# Altium PCB PowerPlane.PcbDoc (part 2 of 2)
Units mm, origin at the board's own origin, x right, y up, seen from the top; angles counter-clockwise.
Board outline 140 x 96 mm, 2 copper layers (Top Layer, Bottom Layer); 117 components, 76 nets, 342 pads, 71 vias.
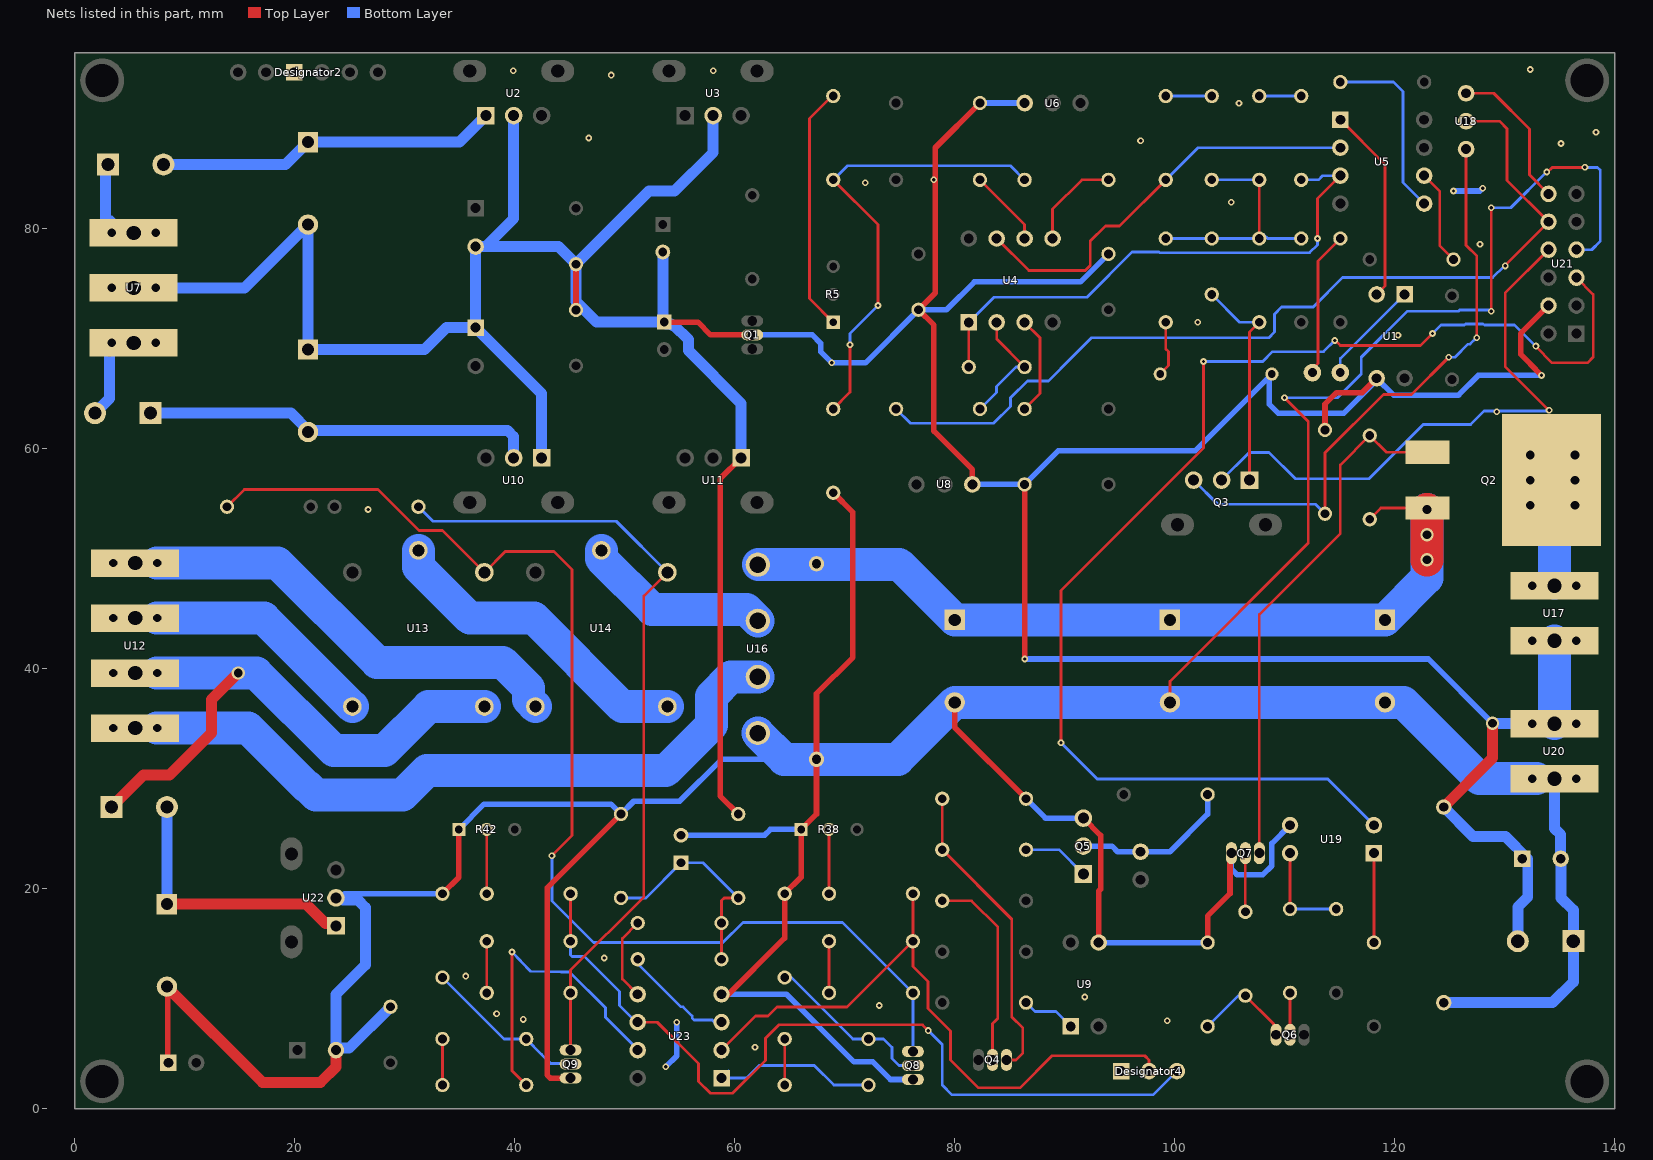
[diagram p2: the nets of this part, all layers, seen from the top]

## Via types
v1: diameter 0.61, hole 0.305, Top Layer to Bottom Layer, 60 vias
v2: diameter 1.2, hole 0.8, Top Layer to Bottom Layer, 11 vias

## Nets (pads, with @x,y where several pads share a name; then routed paths per layer and width w, separated by ;. In a path a pad name is that pad's centre, name@x,y a point inside that pad or via, vN(x,y) a via of type N, cw(c..) or ccw(c..) an arc to the next point about the centre after c; other vN are vias at no path point) (continued)
GND: C14.2 C15.2 C16.2 C17.2 C18.2 C19.2 C20.2 C21.1 D11.1 Designator3.1 Designator4.1 Q5.3 Q7.3 Q8.3 Q9.3 R18.2 R28.2 R30.2 R32.1 R33.1 R34.1 R38.2 R42.2 R45.2 R46.2 U9.3 U16.1 U19.3 U20.2 U21.4 U22.2 U23.4 | length 471
  Top Layer w0.254: C15.2@99.568,36.957 99.568,38.862 112.141,51.435 112.141,62.484 v1(109.982,64.643) ; v1(128.778,72.517) v1(128.778,81.915) ; v1(133.814,85.173) 133.911,85.173 134.326,85.589 137.278,85.589 v1(137.296,85.607)
  Top Layer w0.508: C20.2@8.382,11.109 8.445,11.045 8.445,4.381 Designator3.1@8.509,4.318 ; R45.2@33.428,19.558 34.925,21.055 R42.2@34.925,25.4 ; Q9.3@45.12,2.777 43.24,2.777 42.943,3.075 42.943,20.083 R34.1@49.657,26.797 ; U23.4@59.118,10.096 64.543,15.521 R46.2@64.543,19.558 66.04,21.055 R38.2@66.04,25.4 67.437,26.797 R33.1@67.437,31.77 67.437,37.744 70.739,41.046 70.739,54.229 R18.2@68.961,56.007 ; C17.2@80.01,36.95 80.01,34.671 R28.2@86.487,28.194 ; Q5.3@91.694,26.427 93.269,24.852 93.269,19.964 93.091,19.787 U9.3@93.091,15.113 ; R30.2@102.997,15.113 102.997,17.526 105.029,19.558 105.029,23.241 Q7.3@105.156,23.241
  Top Layer w1: C20.2@8.445,11.045 17.078,2.413 22.352,2.413 23.749,3.81 C19.2@23.749,5.334
  Bottom Layer w0.254: v1(109.982,64.643) 114.805,64.643 116.967,66.805 116.967,68.326 121.158,72.517 125.801,72.517 125.915,72.632 128.567,72.632 128.682,72.517 v1(128.778,72.517) ; v1(128.778,81.915) 130.556,81.915 v1(133.814,85.173) ; U21.4@136.532,78.105 137.922,78.105 138.684,78.867 138.684,85.344 138.439,85.589 137.314,85.589 v1(137.296,85.607)
  Bottom Layer w0.508: C19.2@23.749,5.334 C19.2@23.939,5.524 ; U22.2@23.749,19.177 23.945,18.981 23.958,18.968 24.052,19.062 24.548,19.558 R45.2@33.428,19.558 ; R42.2@34.925,25.4 37.223,27.698 48.756,27.698 R34.1@49.657,26.797 50.824,27.964 54.99,27.964 58.796,31.77 64.496,31.77 ; v1(53.721,3.81) 54.737,4.826 v1(54.737,7.874) ; C18.2@55.118,24.872 62.718,24.872 63.246,25.4 R38.2@66.04,25.4 ; U23.4@58.801,10.414 64.699,10.414 70.846,4.267 72.568,4.267 74.168,2.667 Q8.3@76.162,2.667 ; R28.2@86.487,28.194 88.254,26.427 Q5.3@91.694,26.427 ; U9.3@93.091,15.113 R30.2@102.997,15.113 ; Q7.3@105.156,23.241 105.156,21.793 105.664,21.285 108.026,21.285 108.839,22.098 108.839,24.13 U19.3@110.49,25.781
  Bottom Layer w1: C19.2@23.749,5.334 23.749,10.414 26.416,13.081 26.416,18.288 25.736,18.968 24.382,18.968 24.288,19.062 24.052,19.062 24.026,19.062 U22.2@23.945,18.981 ; C19.2@23.939,5.524 24.955,5.524 C21.1@28.702,9.271 ; R32.1@124.46,9.652 134.366,9.652 136.239,11.525 D11.1@136.239,15.24 136.239,18.066 135.128,19.177 C14.2@135.128,22.733 ; U20.2@134.493,30.099 134.525,30.067 U20.2@134.525,30.012 134.525,25.495 135.1,24.92 C14.2@135.1,22.733
  Bottom Layer w3: U16.1@62.103,34.163 64.496,31.77 R33.1@67.437,31.77 74.83,31.77 C17.2@80.01,36.95 C15.2@99.568,36.95 C16.2@119.126,36.95 120.784,36.95 127.722,30.012 U20.2@132.525,30.012 U20.2@132.915,30.012
  other v1: 61.849,5.588 99.314,8.001 40.767,8.128 38.354,8.636 73.152,9.398 91.821,10.16 35.56,12.065 48.133,13.716
GND_H: C1.1 C3.2 C4.2 C5.2 C6.1 C7.1 C8.1 C9.2 C10.1 C11.1 C12.2 C14.1 D11.2 Designator2.3 Q1.2 R9.2 R12.2 R27.1 R31.2 R32.2 U1.3 U2.2 U3.2 U6.3 U7.2 U8.3 U10.1 U11.1 U17.2 U20.1 U21.11 | length 463.9
  Top Layer w0.508: C9.2@45.571,72.626 C6.1@45.571,76.789 ; C11.1@53.594,71.525 56.648,71.525 57.814,70.358 Q1.2@61.595,70.358 ; R31.2@60.325,26.797 58.674,28.448 58.674,57.277 U11.1@60.579,59.182 ; U8.3@81.608,56.769 81.608,58.117 78.103,61.622 78.103,71.249 C1.1@76.708,72.644 78.232,74.168 78.232,87.376 R9.2@82.296,91.44 ; v1(86.36,40.894) R12.2@86.36,56.769 ; R27.1@113.665,61.722 113.665,64.061 114.714,65.11 117.053,65.11 U1.3@118.364,66.421 ; U17.2@132.915,42.562 U17.2@134.915,42.562 ; v1(133.35,66.675) 132.381,67.644 132.381,67.673 131.445,68.609 131.445,70.478 U21.11@133.992,73.025 ; U20.1@134.875,35.052 U20.1@134.915,35.012
  Top Layer w1: R32.2@124.46,27.432 128.905,31.877 v2(128.905,35.052)
  Bottom Layer w0.508: U7.2@3.364,74.629 U7.2@5.364,74.629 U7.2@7.364,74.629 ; Q1.2@61.595,70.358 67.056,70.358 67.818,69.596 67.818,68.834 v1(68.834,67.818) 71.882,67.818 C1.1@76.708,72.644 79.248,72.644 81.785,75.181 91.437,75.181 C10.1@93.98,77.724 ; U8.3@81.608,56.769 R12.2@86.36,56.769 89.433,59.842 101.879,59.842 C12.2@108.585,66.548 ; R9.2@82.296,91.44 U6.3@86.36,91.44 ; v1(86.36,40.894) 123.063,40.894 v2(128.905,35.052) ; C12.2@108.839,66.802 C12.2@108.585,66.548 ; v1(125.349,83.439) 127.734,83.439 127.988,83.693 v1(128.016,83.693) ; U17.2@132.915,42.562 U17.2@136.915,42.562 ; v1(133.35,66.675) 127.6,66.675 125.807,64.882 119.903,64.882 U1.3@118.364,66.421 118.364,66.226 115.384,63.246 109.403,63.246 108.585,64.064 C12.2@108.585,66.548 ; U20.1@134.915,35.012 U20.1@136.525,35.012 U20.1@136.915,35.012
  Bottom Layer w1: U7.2@7.364,74.629 15.451,74.629 C3.2@21.209,80.387 C8.1@21.209,69.028 31.817,69.028 33.817,71.028 C7.1@36.449,71.028 ; U2.2@39.912,90.297 39.912,80.933 37.366,78.387 ; U10.1@42.452,59.182 42.452,65.025 C7.1@36.449,71.028 ; C5.2@53.467,77.89 C11.1@53.467,71.525 ; U3.2@58.039,90.297 58.015,90.273 58.015,86.921 54.532,83.439 52.221,83.439 C6.1@45.571,76.789 ; U11.1@60.579,59.182 60.579,64.135 55.785,68.929 55.785,69.932 54.502,71.216 54.355,71.216 54.221,71.35 53.769,71.35 C11.1@53.594,71.525 C11.1@53.467,71.525 ; R32.2@124.46,27.432 127.127,24.765 130.068,24.765 132.1,22.733 132.1,19.252 131.191,18.343 D11.2@131.191,15.24 ; v2(128.905,35.052) 134.525,35.052 U20.1@134.875,35.052 ; C7.1@36.449,71.028 C4.2@36.449,78.387 37.366,78.387 ; 37.366,78.387 43.973,78.387 C6.1@45.571,76.789 ; C6.1@45.571,76.789 45.571,73.406 47.452,71.525 C11.1@53.467,71.525
  Bottom Layer w3: U20.1@134.525,35.012 134.525,35.052 U17.2@134.525,42.545
  other v1: 26.67,54.483 120.299,70.328 102.108,71.501 127.762,78.613 105.156,82.423 71.882,84.201 78.105,84.455 135.128,87.757 96.901,88.011 46.736,88.265 138.303,88.773 105.855,91.419 48.768,93.98 39.878,94.361 58.039,94.361 132.334,94.488
NetC2_2: C2.2 R4.1 U4.2 | length 11.1
  Top Layer w0.254: U4.2@83.82,71.501 83.82,69.977 C2.2@86.36,67.437
  Bottom Layer w0.254: R4.1@82.296,63.627 83.805,65.136 83.805,65.659 85.583,67.437 C2.2@86.36,67.437
NetC3_1: C3.1 D2.2 U2.1 | length 31.1
  Bottom Layer w1: D2.2@8.064,85.852 19.174,85.852 C3.1@21.209,87.887 34.962,87.887 U2.1@37.372,90.297
NetC8_2: C8.2 D3.1 U10.2 | length 35.8
  Bottom Layer w1: D3.1@6.889,63.246 19.651,63.246 21.209,61.688 39.327,61.688 39.912,61.102 U10.2@39.912,59.182
NetC12_1: C12.1 R19.2 | length 5.1
  Top Layer w0.254: C12.1@98.679,66.802 99.441,67.564 99.441,68.834 99.187,69.088 R19.2@99.187,71.501
NetC13_1: C13.1 D4.1 D5.1 D6.1 R16.2 R19.1 | length 22.3
  Top Layer w0.254: D6.1@107.696,79.121 D4.1@107.696,84.455
  Bottom Layer w0.254: R19.1@99.187,79.121 C13.1@103.378,79.121 D6.1@107.696,79.121 108.077,79.502 108.458,79.121 R16.2@111.506,79.121 ; D5.1@103.378,84.455 D4.1@107.696,84.455
NetC13_2: C13.2 D6.2 Q3.1 | length 20.1
  Top Layer w0.254: Q3.1@106.807,57.15 106.807,70.612 D6.2@107.696,71.501
  Bottom Layer w0.254: C13.2@103.378,74.041 105.918,71.501 D6.2@107.696,71.501
NetC15_1: C15.1 C16.1 C17.1 Q2.3 R20.1 R33.2 U16.4 | length 86.4
  Top Layer w0.254: R20.1@117.729,53.594 118.745,54.61 Q2.3@122.999,54.61
  Top Layer w3: v2(122.936,49.911) v2(122.936,54.483)
  Bottom Layer w0.254: U16.4@62.103,49.463 64.719,49.463 64.806,49.55 R33.2@67.437,49.55
  Bottom Layer w0.508: U16.4@62.103,49.463 U16.4@62.146,49.506
  Bottom Layer w3: U16.4@62.146,49.506 74.954,49.506 C17.1@80.01,44.45 C15.1@99.568,44.45 C16.1@119.126,44.45 122.936,48.26 v2(122.936,54.483)
  other v2: 122.936,52.197
NetC18_1: C18.1 R31.1 R34.2 R43.2 R44.1 | length 20.7
  Top Layer w0.254: R43.2@58.801,13.208 R44.1@58.801,16.891 58.801,18.923 59.055,19.177 R31.1@60.325,19.177
  Bottom Layer w0.254: R34.2@49.657,19.177 51.923,19.177 C18.1@55.118,22.372 57.13,22.372 R31.1@60.325,19.177
NetC20_1: C20.1 D10.2 U22.1 | length 25
  Top Layer w1: C20.1@8.382,18.609 21.042,18.609 22.79,16.861 23.525,16.861 U22.1@23.749,16.637
  Bottom Layer w1: C20.1@8.382,18.609 D10.2@8.382,27.432
NetD1_1: D1.1 R2.2 | length 13.2
  Top Layer w0.254: D1.1@112.522,66.929 112.522,67.243 113.03,67.751 113.03,77.089 R2.2@115.062,79.121
NetD1_2: D1.2 U1.1 | length 9.5
  Bottom Layer w0.254: D1.2@115.062,66.929 115.062,68.217 120.886,74.041 U1.1@120.904,74.041
NetD2_1: D2.1 U7.1 | length 12.6
  Top Layer w1: U7.1@2.794,80.34 3.364,79.771 U7.1@3.364,79.629
  Bottom Layer w0.254: U7.1@3.364,79.629 3.364,81.066 4.801,79.629 U7.1@5.364,79.629 U7.1@7.364,79.629
  Bottom Layer w1: U7.1@2.794,80.34 2.794,85.629 D2.1@3.017,85.852
NetD3_2: D3.2 U7.3 | length 16.6
  Top Layer w0.508: U7.3@3.175,68.633 3.767,69.225 4.171,69.629 U7.3@5.364,69.629
  Bottom Layer w0.254: 3.175,64.579 U7.3@3.175,68.633 ; U7.3@3.364,69.629 U7.3@5.364,69.629 U7.3@7.364,69.629
  Bottom Layer w1: D3.2@1.841,63.246 3.175,64.579 U7.3@3.175,68.633
NetD4_2: D4.2 R15.2 | length 4.1
  Bottom Layer w0.254: D4.2@107.696,92.075 108.026,91.745 108.356,92.075 R15.2@111.506,92.075
NetD5_2: D5.2 R17.2 | length 4.2
  Bottom Layer w0.254: R17.2@99.187,92.075 D5.2@103.378,92.075
NetD7_1: D7.1 Q5.2 U15.2 | length 14.7
  Bottom Layer w0.508: Q5.2@91.694,23.887 94.285,23.887 94.804,23.368 U15.2@96.901,23.368 99.568,23.368 102.997,26.797 D7.1@102.997,28.575
NetD10_1: D10.1 U12.3 U13.4 | length 56.7
  Top Layer w1: D10.1@3.334,27.432 6.238,30.336 8.605,30.336 12.446,34.177 12.446,37.211 v2(14.859,39.624)
  Bottom Layer w0.254: U12.3@3.493,39.618 U12.3@5.493,39.618 U12.3@7.493,39.618
  Bottom Layer w3: U12.3@7.493,39.618 16.517,39.618 23.579,32.556 28.147,32.556 32.163,36.572 U13.4@37.242,36.572
NetD12_1: D12.1 R35.1 | length 4.7
  Top Layer w0.254: D12.1@68.58,10.541 R35.1@68.58,15.24
NetD13_1: D13.1 R36.1 | length 4.7
  Top Layer w0.254: D13.1@37.465,10.541 R36.1@37.465,15.24
NetD14_1: D14.1 Q8.2 R46.1 | length 15.4
  Bottom Layer w0.254: R46.1@64.543,11.938 65.151,11.938 70.739,6.35 D14.1@72.163,6.35 73.533,6.35 74.295,5.588 74.295,5.207 74.295,4.572 74.93,3.937 Q8.2@76.024,3.937
NetD14_2: D14.2 R40.1 | length 4.2
  Top Layer w0.254: R40.1@64.543,2.159 D14.2@64.543,6.35
NetD15_1: D15.1 Q9.2 R45.1 | length 15.9
  Bottom Layer w0.254: R45.1@33.428,11.938 39.016,6.35 D15.1@41.048,6.35 42.45,4.948 43.277,4.121 45.387,4.121 45.682,4.121 45.738,4.064 Q9.2@45.387,4.064
NetD15_2: D15.2 R41.1 | length 4.2
  Top Layer w0.254: R41.1@33.428,2.159 D15.2@33.428,6.35
NetQ2_1: Q2.1 Q7.1 R20.2 | length 48
  Top Layer w0.254: Q7.1@107.696,23.241 107.696,44.94 115.062,52.306 115.062,58.547 R20.2@117.729,61.214 119.253,59.69 Q2.1@122.999,59.69
NetQ4_1: Q4.1 R24.1 R28.1 | length 27.8
  Top Layer w0.254: R28.1@78.867,28.194 R24.1@78.867,23.558 85.192,17.234 85.192,8.357 86.195,7.353 86.195,5.08 85.56,4.445 Q4.1@84.836,4.445
NetQ4_2: Q4.2 R22.2 | length 18.3
  Top Layer w0.254: R22.2@78.867,18.909 81.534,18.909 83.922,16.521 83.922,8.23 83.566,7.874 83.439,7.747 Q4.2@83.439,4.445
NetQ5_1: Q5.1 R24.2 | length 6.1
  Bottom Layer w0.254: R24.2@86.487,23.558 89.483,23.558 Q5.1@91.694,21.347
NetQ6_1: Q6.1 R26.2 R30.1 | length 9.4
  Top Layer w0.254: R26.2@106.68,10.287 106.68,10.033 108.661,8.052 108.982,7.731 108.982,7.671 109.22,7.433 Q6.1@109.22,6.731
  Bottom Layer w0.254: R30.1@102.997,7.493 105.791,10.287 R26.2@106.68,10.287
NetQ6_2: Q6.2 R25.2 | length 3.8
  Top Layer w0.254: Q6.2@110.49,6.731 110.49,9.64 R25.2@110.49,10.541
NetQ7_2: Q7.2 R26.1 | length 5.3
  Top Layer w0.254: R26.1@106.426,17.907 106.426,19.929 Q7.2@106.426,23.241
NetR5_2: R5.2 R11.1 | length 22.4
  Top Layer w0.254: R5.2@68.961,71.501 66.802,73.66 66.802,90.043 68.834,92.075 R11.1@68.961,92.075
NetR6_1: R6.1 U5.6 | length 8.7
  Top Layer w0.254: U5.6@122.682,84.836 124.092,83.426 124.092,78.473 R6.1@125.349,77.216
NetR7_2: R7.2 U4.6 | length 7
  Top Layer w0.254: R7.2@82.296,84.455 86.36,80.391 U4.6@86.36,79.121
NetR8_1: R8.1 U4.3 | length 9
  Top Layer w0.254: R8.1@86.36,63.627 87.757,65.024 87.757,70.104 U4.3@86.36,71.501
NetR10_1: R10.1 U5.5 | length 17
  Bottom Layer w0.254: R10.1@115.062,93.345 119.888,93.345 120.752,92.481 120.752,84.226 U5.5@122.682,82.296
NetR13_2: R13.2 U9.1 | length 5
  Bottom Layer w0.254: R13.2@86.487,9.652 87.295,8.844 89.2,8.844 U9.1@90.551,7.493
NetR14_1: R14.1 U4.5 | length 8.9
  Top Layer w0.254: U4.5@88.9,79.121 88.9,81.788 91.567,84.455 R14.1@93.98,84.455
NetR29_2: R29.2 U19.1 | length 8.1
  Top Layer w0.254: R29.2@118.11,15.113 U19.1@118.11,23.241
NetR35_2: Designator4.2 R35.2 R39.1 U23.2 | length 60
  Top Layer w0.254: U23.2@58.801,4.699 U23.2@59.118,5.016 ; U23.2@58.801,5.334 61.9,8.433 63.013,8.433 63.836,9.256 70.216,9.256 R35.2@76.2,15.24 ; R39.1@76.2,19.558 R35.2@76.2,15.24 ; Designator4.2@97.663,3.429 97.663,4.445 97.282,4.826 88.847,4.826 85.926,1.905 84.455,1.905 82.169,1.905 79.629,4.445 79.629,7.073 77.582,9.12 77.582,11.572 76.2,12.954 R35.2@76.2,15.24
NetR36_2: Designator4.3 R36.2 R37.1 U23.6 | length 77.1
  Top Layer w0.254: R36.2@45.085,15.24 R37.1@45.085,19.558 ; U23.6@51.181,7.874 52.959,7.874 56.707,4.126 56.707,2.49 57.788,1.409 59.814,1.409 62.789,4.384 62.789,6.413 64.011,7.635 77.074,7.635 v1(77.597,7.112)
  Bottom Layer w0.254: R36.2@45.085,15.24 45.085,13.992 45.234,13.843 46.355,13.843 49.53,10.668 49.53,9.398 U23.6@51.181,7.747 ; v1(77.597,7.112) 78.867,5.842 78.867,4.445 78.867,3.429 78.867,2.159 79.756,1.27 82.804,1.27 83.82,1.27 98.044,1.27 Designator4.3@100.203,3.429
NetR37_2: R37.2 R42.3 | length 5.8
  Top Layer w0.254: R37.2@37.465,19.558 R42.3@37.465,25.4
NetR38_3: R38.3 R39.2 | length 5.8
  Top Layer w0.254: R39.2@68.58,19.558 R38.3@68.58,25.4
NetR40_2: R40.2 U23.1 | length 15.5
  Bottom Layer w0.254: U23.1@59.436,3.429 U23.1@58.801,2.794 61.087,2.794 62.23,3.937 67.234,3.937 69.012,2.159 R40.2@72.163,2.159
NetR41_2: R41.2 U23.7 | length 28.7
  Top Layer w0.254: v1(39.751,14.249) 39.751,3.456 R41.2@41.048,2.159
  Bottom Layer w0.254: v1(39.751,14.249) 41.423,12.505 44.196,12.446 44.997,12.446 48.26,9.183 48.26,8.382 ; 48.232,8.354 50.863,5.722 U23.7@51.181,5.334 ; U23.7@50.863,5.016 U23.7@51.181,4.699
NetR43_1: R43.1 U23.3 | length 9.8
  Bottom Layer w0.254: R43.1@51.181,13.208 55.118,9.271 55.316,9.271 56.134,8.453 56.134,8.255 56.312,8.077 57.963,8.077 U23.3@58.483,7.556
NetR44_2: R44.2 U23.5 | length 7.6
  Top Layer w0.254: U23.5@51.181,10.414 49.784,11.811 49.784,15.494 R44.2@51.181,16.891
NetU1_2: U1.2 U5.1 | length 17.9
  Top Layer w0.254: U5.1@115.062,89.916 119.126,85.852 119.126,74.803 U1.2@118.364,74.041
NetU12_1: U12.1 U14.5 | length 44.4
  Bottom Layer w0.254: U12.1@3.493,49.618 U12.1@5.493,49.618 U12.1@7.493,49.618
  Bottom Layer w3: U12.1@7.493,49.618 18.454,49.618 27.484,40.588 38.905,40.588 41.258,38.235 41.258,37.193 U14.5@41.879,36.572
NetU12_2: U12.2 U13.5 | length 25.1
  Bottom Layer w0.254: U12.2@3.493,44.618 U12.2@5.493,44.618
  Bottom Layer w0.508: U12.2@5.493,44.618 U12.2@7.493,44.618
  Bottom Layer w3: U12.2@7.493,44.618 17.196,44.618 U13.5@25.242,36.572
NetU12_4: U12.4 U16.2 | length 67.1
  Bottom Layer w0.254: U12.4@3.493,34.618 U12.4@5.493,34.618
  Bottom Layer w0.508: U12.4@5.493,34.618 U12.4@7.493,34.618
  Bottom Layer w3: U12.4@7.493,34.618 15.762,34.618 21.069,29.311 21.144,29.311 21.915,28.54 29.81,28.54 32.004,30.734 53.72,30.734 57.895,34.909 57.895,37.506 59.652,39.263 U16.2@62.103,39.263
NetU13_2: U13.2 U14.4 | length 29.4
  Bottom Layer w3: U13.2@31.242,50.772 31.242,49.276 35.914,44.604 41.756,44.604 49.788,36.572 U14.4@53.879,36.572
NetU14_2: U14.2 U16.3 | length 17.3
  Bottom Layer w3: U14.2@47.879,50.772 47.879,50.012 52.485,45.406 61.06,45.406 U16.3@62.103,44.363
NTC: U18.3 U21.7 | length 13.7
  Top Layer w0.254: U18.3@126.492,92.329 129.014,92.329 132.258,89.085 132.258,84.919 U21.7@133.992,83.185
POWER_IN: Q2.2 Q3.2 U17.1 U21.9 | length 70.3
  Top Layer w0.254: U21.9@133.992,78.105 130.048,74.161 130.048,67.493 v1(134.041,63.5) ; Q2.2@134.159,52.378 Q2.2@135.077,51.46
  Bottom Layer w0.254: Q3.2@104.267,57.15 106.782,59.665 108.585,59.665 110.973,57.277 117.659,57.277 122.597,62.215 126.912,62.215 128.128,63.432 129.227,63.432 v1(129.286,63.373) 129.345,63.432 134.044,63.432 v1@134.112,63.5 ; v2(132.334,59.436) 134.62,57.15 ; U17.1@132.915,47.561 134.915,47.561 U17.1@136.915,47.561
  Bottom Layer w3: 134.493,57.15 134.525,57.118 U17.1@134.525,47.795
  other v2: 132.334,54.864 136.398,54.864 132.334,57.15 136.398,57.15 136.398,59.436
POWER_REG: Q3.3 R27.2 U18.1 | length 54.4
  Top Layer w0.254: R27.2@113.665,54.102 113.665,59.639 118.974,64.948 121.539,64.948 v1(124.917,68.326) ; U18.1@126.492,87.249 126.492,78.511 127.471,77.532 v1(127.471,70.092)
  Bottom Layer w0.254: Q3.3@101.727,57.15 103.911,54.966 112.801,54.966 R27.2@113.665,54.102 ; v1(124.917,68.326) 125.476,68.326 126.667,69.517 126.846,69.517 127.421,70.092 v1(127.471,70.092)
REG_C: C2.1 R15.1 U4.1 U5.3 | length 49.6
  Top Layer w0.254: C2.1@81.28,67.437 U4.1@81.28,71.501 ; v1(112.979,79.121) 112.979,82.753 U5.3@115.062,84.836
  Bottom Layer w0.254: U4.1@81.28,71.501 83.563,73.784 92.015,73.784 96.134,77.902 98.589,77.902 98.655,77.836 112.268,77.836 112.979,78.547 v1(112.979,79.121) ; R15.1@111.506,84.455 113.081,84.455 113.462,84.836 U5.3@115.062,84.836
REG_V: R17.1 U4.7 U5.2 | length 38.4
  Top Layer w0.254: U4.7@83.82,79.121 86.741,76.2 91.872,76.2 92.329,76.657 92.329,78.892 93.701,80.264 94.996,80.264 R17.1@99.187,84.455
  Bottom Layer w0.254: R17.1@99.187,84.455 102.108,87.376 U5.2@115.062,87.376
SAMPLE_C: R4.2 U18.2 U21.8 | length 82.9
  Top Layer w0.254: U18.2@126.492,89.789 129.54,89.789 130.226,89.103 130.226,84.411 U21.8@133.992,80.645 133.992,80.61 130.048,76.666 v1(130.048,76.632)
  Bottom Layer w0.254: R4.2@74.676,63.627 75.971,62.332 83.541,62.332 85.075,63.866 85.075,64.643 86.608,66.176 88.528,66.176 90.721,68.369 92.456,70.104 108.56,70.104 109.068,70.612 109.068,72.238 109.728,72.898 112.598,72.898 115.265,75.565 128.912,75.565 129.979,76.632 v1(130.048,76.632)
SAMPLE_V: R11.2 R14.2 R18.1 | length 42.5
  Top Layer w0.254: R18.1@68.961,63.627 70.485,65.151 v1(70.485,69.469) ; R11.2@68.961,84.455 73.025,80.391 v1(73.025,73.025)
  Bottom Layer w0.254: R11.2@68.961,84.455 70.246,85.74 85.075,85.74 R14.2@86.36,84.455 ; v1@70.485,69.596 70.485,70.485 v1(73.025,73.025)
SWITCH: U19.2 U21.3 | length 118.4
  Top Layer w0.254: v1(89.662,33.274) 89.662,47.114 102.616,60.068 v1(102.616,67.945) ; v1(114.554,69.85) 114.601,69.85 115.062,69.388 122.347,69.388 v1(123.444,70.485) ; v1(132.842,69.342) 132.842,69.291 134.315,67.818 137.541,67.818 138.049,68.326 138.049,74.048 U21.3@136.532,75.565
  Bottom Layer w0.254: v1(89.662,33.274) 92.964,29.972 113.919,29.972 U19.2@118.11,25.781 ; v1(102.616,67.945) 108.006,67.945 108.895,68.834 113.538,68.834 v1(114.554,69.85) ; v1(123.444,70.485) 124.206,71.247 126.327,71.247 126.441,71.362 128.041,71.362 128.156,71.247 130.886,71.247 132.791,69.342 v1(132.842,69.342)
SWITCH_L: R23.1 R25.1 U19.4 | length 9.3
  Top Layer w0.254: R25.1@110.49,18.161 U19.4@110.49,23.241
  Bottom Layer w0.254: R25.1@110.49,18.161 R23.1@114.681,18.161
T1: D8.1 D12.2 Q8.1 U13.3 | length 111.1
  Top Layer w0.254: D8.1@13.843,54.737 15.418,56.312 27.559,56.312 31.293,52.578 33.436,52.578 U13.3@37.242,48.772 39.143,50.673 43.561,50.673 45.212,49.022 45.212,24.841 v1(43.383,23.012) ; D12.2@76.2,10.541 D12.2@76.2,11.049
  Bottom Layer w0.254: v1(43.383,23.012) 43.383,18.898 47.168,15.113 58.914,15.113 60.743,16.942 69.799,16.942 D12.2@76.2,10.541 Q8.1@76.2,5.207
T2: D9.1 D13.2 Q9.1 U14.3 | length 72.8
  Top Layer w0.254: Q9.1@45.085,5.334 D13.2@45.085,11.176 ; D13.2@45.085,10.541 45.085,12.612 51.74,19.267 51.74,46.633 U14.3@53.879,48.772
  Bottom Layer w0.254: D9.1@31.242,54.737 32.563,53.416 49.235,53.416 U14.3@53.879,48.772
pads on no net: Q3.0 U2.0 U3.0 U5.7 U10.0 U11.0 U22.0

## Polygon pours and split planes (outlines as drawn)
GND on Bottom Layer "Bottom Layer-GND" (solid, remove dead copper, pour order 4): 0,0 0,31.242 14.478,31.242 19.939,25.781 31.496,25.781 33.782,28.067 76.454,28.067 81.915,33.528 119.761,33.528 126.746,26.543 139.954,26.543 140.081,26.416 140.081,0
GND_H on Bottom Layer "Bottom Layer-GND_H" (solid, remove dead copper, pour order 0): 52.197,52.451 51.562,53.086 0,53.086 0,96.012 139.827,96.012 139.954,95.885 139.954,64.389 119.634,64.389 119.634,50.546 77.724,50.546 75.819,52.451
GND on Top Layer "Top Layer-GND" (solid, remove dead copper, pour order 5): 0,0 0,31.242 14.478,31.242 19.939,25.781 31.496,25.781 33.782,28.067 76.454,28.067 81.915,33.528 119.761,33.528 126.746,26.543 139.954,26.543 140.081,26.416 140.081,0
GND_H on Top Layer "Top Layer-GND_H" (solid, remove dead copper, pour order 1): 52.197,52.451 51.562,53.086 0,53.086 0,96.012 139.827,96.012 139.954,95.885 139.954,64.389 119.634,64.389 119.634,50.546 77.724,50.546 75.819,52.451

## Keep-outs
Keep-Out Layer:
  lines w0.254: 140,96 140,0 0,0 0,96.012 140.081,96.012

## Other copper
Bottom Layer:
  rectangle net POWER_IN: 129.032,50.419 139.319,63.881
Multi-Layer:
  pour cut-out: 73.025,3.937 ccw(c76.2,3.937) 76.2,0.762 ccw(c76.2,3.937) 79.375,3.937 ccw(c76.2,3.937) 76.2,7.112 ccw(c76.2,3.937)
  pour cut-out: 61.595,65.858 cw(c61.595,70.358) 57.095,70.358 cw(c61.595,70.358) 61.595,74.858 cw(c61.595,70.358) 66.095,70.358 cw(c61.595,70.358)
  pour cut-out: 107.343,6.688 ccw(c110.372,6.688) 110.372,3.658 ccw(c110.372,6.688) 113.402,6.688 ccw(c110.372,6.688) 110.372,9.717 ccw(c110.372,6.688)
  pour cut-out: 103.114,23.241 ccw(c106.426,23.241) 106.426,19.929 ccw(c106.426,23.241) 109.738,23.241 ccw(c106.426,23.241) 106.426,26.553 ccw(c106.426,23.241)
  pour cut-out: 79.629,4.445 ccw(c83.312,4.445) 83.312,0.762 ccw(c83.312,4.445) 86.995,4.445 ccw(c83.312,4.445) 83.312,8.128 ccw(c83.312,4.445)
  pour cut-out: 41.547,4.064 ccw(c45.085,4.064) 45.085,0.526 ccw(c45.085,4.064) 48.623,4.064 ccw(c45.085,4.064) 45.085,7.602 ccw(c45.085,4.064)
  pour cut-out: 133.5,2.5 ccw(c137.5,2.5) 137.5,-1.5 ccw(c137.5,2.5) 141.5,2.5 ccw(c137.5,2.5) 137.5,6.5 ccw(c137.5,2.5)
  pour cut-out: 2.5,-1.5 cw(c2.5,2.5) -1.5,2.5 cw(c2.5,2.5) 2.5,6.5 cw(c2.5,2.5) 6.5,2.5 cw(c2.5,2.5)
  pour cut-out: 2.5,89.5 cw(c2.5,93.5) -1.5,93.5 cw(c2.5,93.5) 2.5,97.5 cw(c2.5,93.5) 6.5,93.5 cw(c2.5,93.5)
  pour cut-out: 133.5,93.5 ccw(c137.5,93.5) 137.5,89.5 ccw(c137.5,93.5) 141.5,93.5 ccw(c137.5,93.5) 137.5,97.5 ccw(c137.5,93.5)

## Silkscreen, mask and mechanical layers (free items; w line width, h text height)
Top Overlay:
  text "FEDV" at 95.758,90.805 h1.52 r90
  text "+15V" at 12.049,78.232 h1.52 r90
  text "MAXV" at 73.152,76.581 h1.52 r90
  text "GND" at 12.176,73.025 h1.52 r90
  text "-15V" at 12.049,67.818 h1.52 r90
  text "FEDC" at 80.518,59.96 h1.52
  text "35V" at 11.557,49.165 h1.52
  text "PIN" at 126.873,47.244 h1.52
  text "25V" at 11.556,44.212 h1.52
  text "15V" at 11.557,39.132 h1.52
  text "GH" at 129.794,38.37 h1.52
  text "+" at 128.016,36.672 h1.52
  text "0V" at 11.811,34.179 h1.52
  text "-" at 128.397,27.266 h1.52
  text "T1" at 76.454,23.495 h1.52 r90
  text "T2" at 31.877,23.241 h1.52 r90
  text "FAN" at 101.854,18.542 h1.52 r90
  text "+12V" at 96.52,17.018 h1.52
  text "G" at 7.874,1.286 h1.52
  text "+12" at 10.033,1.27 h1.52
  text "G" at 94.488,0.778 h1.52
  text "T1" at 96.901,0.762 h1.52
  text "T2" at 99.568,0.762 h1.52
Bottom Overlay:
  text "-5" at 16.907,91.871 h1.52 r270
  text "+5" at 21.86,91.561 h1.52 r270
  text "-12" at 14.224,91.13 h1.52 r270
  text "GH" at 19.447,91.125 h1.52 r270
  text "+12" at 24.384,90.82 h1.52 r270
  text "+2.5" at 27.194,90.424 h1.52 r270
  text "NTC" at 131.176,82.677 h1.52 r270
  text "FV" at 138.43,82.423 h1.52 r270
  text "SC" at 131.176,80.01 h1.52 r270
  text "FC" at 138.446,79.883 h1.52 r270
  text "DV" at 131.194,77.597 h1.52 r270
  text "OV" at 138.446,77.216 h1.52 r270
  text "-5" at 131.207,74.93 h1.52 r270
  text "SW" at 138.446,74.676 h1.52 r270
  text "G" at 131.176,72.517 h1.52 r270
  text "FAN" at 138.43,71.501 h1.52 r270
  text "+5" at 131.207,69.723 h1.52 r270
  text "CC" at 138.446,68.961 h1.52 r270
Top Solder:
  rectangle: 121.666,48.768 124.206,55.626
  lines w1: 124.46,27.432 128.905,31.877 128.905,35.052
  text "PowerPlaneV1.4 sTeeLM" at 114.935,2.556 h1.52
Bottom Solder:
  rectangle: 132.461,48.133 136.525,53.467
  rectangle: 130.937,52.832 137.922,61.087
  lines w0.254: 29.337,28.321 29.464,28.321 ; 29.337,28.448 29.718,28.448 ; 38.862,40.513 38.989,40.513 ; 41.91,36.576 41.91,37.592 ; 119.246,36.83 120.904,36.83
  lines w1: 124.46,9.652 134.366,9.652 136.271,11.557 ; 124.46,27.432 127.127,24.765 130.048,24.765 131.679,23.134 ; 128.905,35.052 131.318,35.052 ; 131.191,15.24 131.191,18.288 132.08,19.177 132.08,22.733 ; 134.493,25.781 134.493,25.527 135.128,24.892 135.128,19.177 136.239,18.066 136.239,11.525 ; 134.493,26.035 134.493,29.972
  lines w3: 7.493,34.618 15.801,34.618 21.844,28.575 29.21,28.575 ; 7.493,39.618 16.516,39.618 23.622,32.512 28.067,32.512 32.127,36.572 37.242,36.572 ; 7.493,44.618 17.196,44.618 25.242,36.572 ; 7.493,49.618 18.454,49.618 27.559,40.513 38.989,40.513 41.91,37.592 ; 29.718,28.448 31.877,30.607 ; 31.242,50.772 31.242,49.276 35.941,44.577 41.783,44.577 49.788,36.572 53.879,36.572 ; 32.131,30.734 33.655,30.734 53.721,30.734 57.912,34.925 57.912,37.465 59.71,39.263 62.103,39.263 ; 41.275,37.211 41.91,36.576 ; 47.879,50.772 47.879,50.038 52.578,45.339 61.127,45.339 62.103,44.363 ; 62.103,34.163 64.496,31.77 74.823,31.77 80.01,36.957 118.879,36.957 120.777,36.957 127.722,30.012 132.588,30.012 ; 62.103,49.463 74.997,49.463 80.01,44.45 119.126,44.45 122.936,48.26 122.936,54.483 ; 134.493,34.996 134.493,42.545
Mechanical 15:
  circle w0.127: c76.2,3.937 r3.175
  circle w0.127: c110.363,6.731 r3.029
  circle w0.127: c106.426,23.241 r3.312
  circle w0.127: c83.312,4.445 r3.683
  circle w0.127: c45.085,4.064 r3.538
  circle w0.127: c61.595,70.358 r4.5
  lines w0.254: 0,0 140.081,0 140.081,12.065 140.081,26.416 139.954,26.543 126.746,26.543 119.761,33.528 118.618,33.528 81.915,33.528 76.454,28.067 74.295,28.067 33.782,28.067 31.496,25.781 19.939,25.781 14.478,31.242 0,31.242 0,23.622 0,0 ; 0,53.086 0,96.012 139.827,96.012 139.954,95.885 139.954,64.389 119.634,64.389 119.634,50.546 77.724,50.546 75.819,52.451 57.912,52.451 52.197,52.451 51.562,53.086 0,53.086

## Text inside footprints (layer, text, board x,y; h text height)
C3: Top Overlay "+" at 20.574,91.122 h1.5 r270
C4: Top Overlay "+" at 37.846,82.296 h1.5 r270
C5: Top Overlay "+" at 52.705,82.696 h1.5 r270
C7: Top Overlay "+" at 37.846,71.437 h1.5 r270
C8: Top Overlay "+" at 20.574,72.263 h1.5 r270
C11: Top Overlay "+" at 52.832,73.831 h1.5 r270
C14: Top Overlay "+" at 131.191,24.13 h1.5
C15: Top Overlay "+" at 98.933,48.447 h1.5 r270
C16: Top Overlay "+" at 118.491,48.447 h1.5 r270
C17: Top Overlay "+" at 79.375,48.447 h1.5 r270
C18: Top Overlay "+" at 55.88,20.066 h1.5 r90
C19: Top Overlay "+" at 19.84,6.731 h1.5
C20: Top Overlay "+" at 7.747,21.844 h1.5 r270
U16: Top Overlay "+" at 59.69,48.895 h1.52 r90; Top Overlay "~" at 60.452,43.815 h1.52 r90; Top Overlay "~" at 60.452,38.735 h1.52 r90; Top Overlay "-" at 59.944,33.655 h1.52 r90